# Altium PCB PCB1.PcbDoc
Units mil, origin at the board's own origin, x right, y up, seen from the top; angles counter-clockwise.
Board outline 6000 x 4000 mil, 2 copper layers (Top Layer, Bottom Layer); 6 components, 18 nets, 95 pads, 0 vias.
Unrouted connection lines stored in the file: 10.
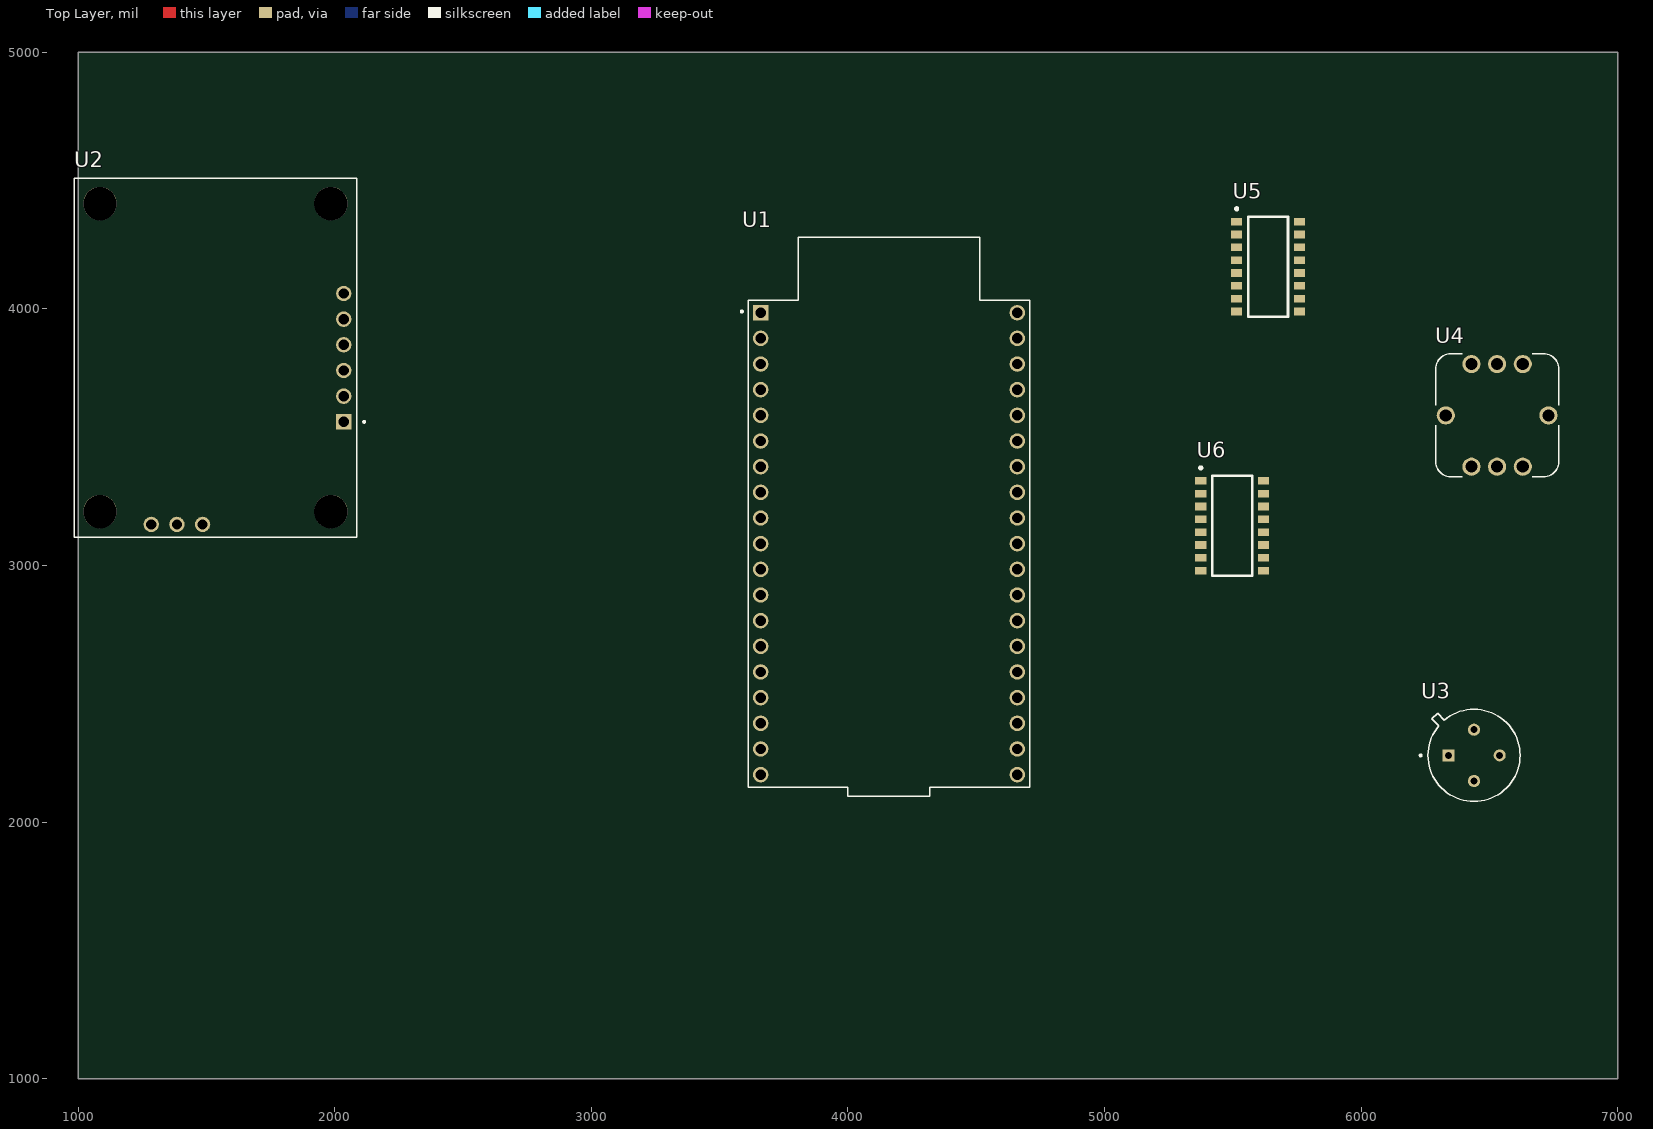
[diagram p0: Top Layer view]
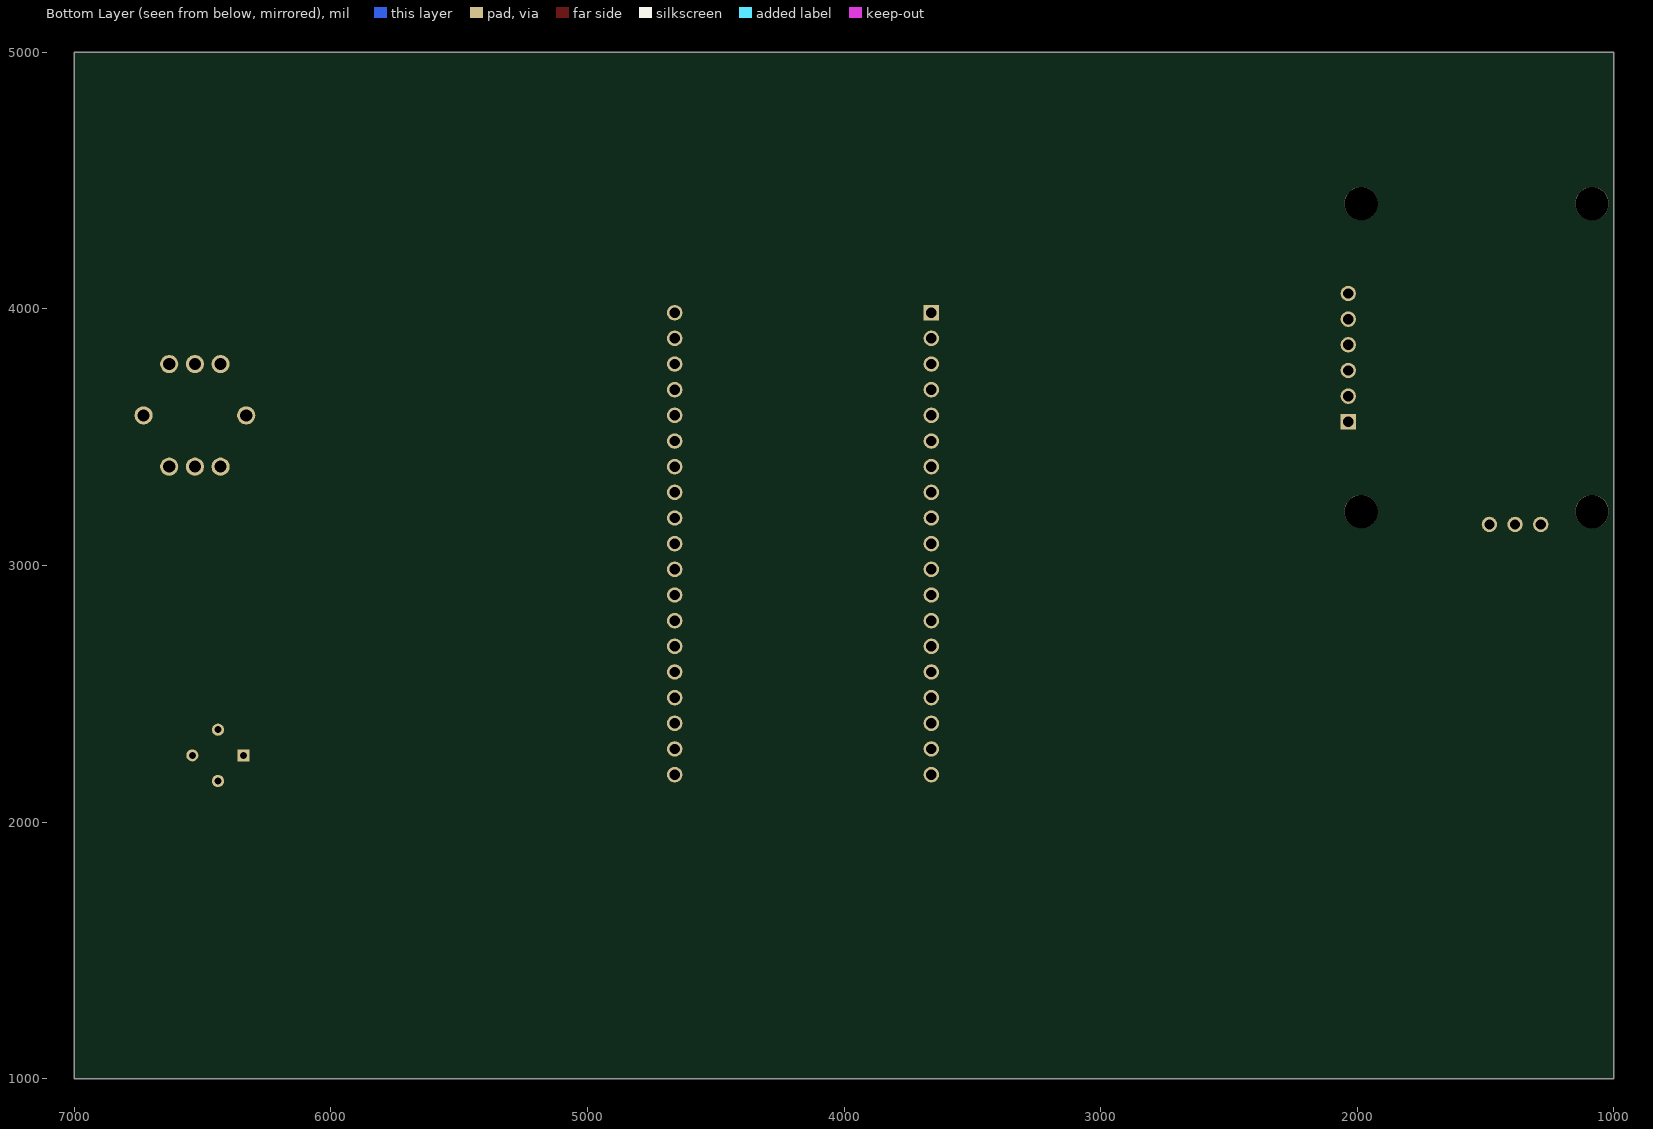
[diagram p1: Bottom Layer view, seen from below]

## Layer stack, top to bottom
Top Solder: solder mask 0.4, Solder Resist, Dk 3.5
Top Layer: signal copper 1.4
Dielectric 1: dielectric 12.6, FR-4, Dk 4.8
Bottom Layer: signal copper 1.4
Bottom Solder: solder mask 0.4, Solder Resist, Dk 3.5

## Board outline
1000,1000 7000,1000 7000,5000 1000,5000

## Design rules (kind name [scope] priority, off if disabled: settings)
Clearance [All] p1: gap=10 ignorepadtopadclearanceinfootprint=FALSE
PolygonConnect [All] p1: connectstyle=Relief reliefconductorwidth=10 reliefentries=4 polygonreliefangle="90 Angle" airgapwidth=10
RoutingVias [All] p1: holewidth=28 width=50 viastyle="Through Hole" minholewidth=28 minwidth=50 maxholewidth=28 maxwidth=50
SolderMaskExpansion [All] p1: expansion=4 istentingtop=FALSE
SupplyNets "Schematic Supply Nets_1" [InNet('GND')] p1: voltage=0.000
SupplyNets "Schematic Supply Nets" [InNet('VCC')] p2: voltage=0.000
Width [All] p1: maxlimit=10 minlimit=10 preferedwidth=10
30 further rules are at their usual default settings.

## Components (designator, comment, footprint, x,y, rotation, side; value= is the part's Value field where it differs from the comment)
U1 "ESP32-DEVKITC" MODULE_ESP32-DEVKITC 4160,3085.39 r0 top
U2 "SEN-12650" MODULE_SEN-12650 2085,3110 r90 top
U3 "MLX90614ESF-AAA-000-TU" TO254P912H435-4 6440,2260 r0 top
U4 "MAXREFDES117#" MODULE_MAXREFDES117# 6530,3585 r0 top
U5 "HX711" HX711 5635,4165 r0 top
U6 "HX711" HX711 5495,3155 r0 top

## Footprints (in the part's own frame and the unit in brackets; to place one, negate y for a bottom-side part, rotate by r counter-clockwise, add the part's x,y. Pads: shape width x height; smd on the part's side, far side on the other; paste and mask are expansions set on the pad)
HX711 [mm] "Load Cell amplifier"
  rect 1.1x0.76 smd: 1(-3.048,4.445) 2(-3.048,3.175) 3(-3.048,1.905) 4(-3.048,0.635) 5(-3.048,-0.635) 6(-3.048,-1.905) 7(-3.048,-3.175) 8(-3.048,-4.445) 9(3.175,-4.445) 10(3.175,-3.175) 11(3.175,-1.905) 12(3.175,-0.635) 13(3.175,0.635) 14(3.175,1.905) 15(3.175,3.175) 16(3.175,4.445)
  silkscreen extent -3.17,-4.95 2.03,5.84, body extent -3.02,-5.07 3.17,4.95, height 1.91
MODULE_ESP32-DEVKITC [mm]
  rect 1.53x1.53 / inner round 1.53 / far side rect 1.53x1.53 hole 1.02: 1(-12.7,22.85)
  round 1.53 hole 1.02: 2(-12.7,20.31) 3(-12.7,17.77) 4(-12.7,15.23) 5(-12.7,12.69) 6(-12.7,10.15) 7(-12.7,7.61) 8(-12.7,5.07) 9(-12.7,2.53) 10(-12.7,-0.01) 11(-12.7,-2.55) 12(-12.7,-5.09) 13(-12.7,-7.63) 14(-12.7,-10.17) 15(-12.7,-12.71) 16(-12.7,-15.25) 17(-12.7,-17.79) 18(-12.7,-20.33) 19(-12.7,-22.87) 20(12.7,-22.87) 21(12.7,-20.33) 22(12.7,-17.79) 23(12.7,-15.25) 24(12.7,-12.71) 25(12.7,-10.17) 26(12.7,-7.63) 27(12.7,-5.09) 28(12.7,-2.55) 29(12.7,-0.01) 30(12.7,2.53) 31(12.7,5.07) 32(12.7,7.61) 33(12.7,10.15) 34(12.7,12.69) 35(12.7,15.23) 36(12.7,17.77) 37(12.7,20.31) 38(12.7,22.85)
  silkscreen extent -14.67,-25 13.95,30.3, body extent -13.97,-24.8 13.97,30.3, height 6.69
MODULE_MAXREFDES117# [mm]
  round 1.8 hole 1.2: GND(-5.08,0) INT(-2.54,5.08) INT1(-2.54,-5.08) SCL(0,5.08) SCL1(0,-5.08) SDA(2.54,5.08) SDA1(2.54,-5.08) VIN(5.08,0)
  silkscreen extent -6.1,-6.1 6.1,6.1, body extent -6.1,-6.1 6.1,6.1, height 2.56
MODULE_SEN-12650 [mil]
  round 60 hole 40: JP1_1(50,600) JP1_2(50,700) JP1_3(50,800) JP3_2(550,50) JP3_3(650,50) JP3_4(750,50) JP3_5(850,50) JP3_6(950,50)
  rect 60x60 / inner round 60 / far side rect 60x60 hole 40: JP3_1(450,50)
  round 130 hole 130 unplated: ""(100,1000) ""(100,100) ""(1300,100) ""(1300,1000)
  silkscreen extent 0,-33 1400,1100
TO254P912H435-4 [mm]
  rect 1.198x1.198 / inner round 1.198 / far side rect 1.198x1.198 hole 0.69: 1(-2.54,0)
  round 1.198 hole 0.69: 2(0,-2.54) 3(2.54,0) 4(0,2.54)
  silkscreen extent -5.38,-4.56 4.56,4.56, body extent -4.56,-4.56 4.56,4.56, height 4.25

## Part data
U1: "ESP32-WROOM-32UE series Transceiver; 802.11 b/g/n (Wi-Fi, WiFi, WLAN), Bluetooth Â® Smart Ready 4.x Dual Mode Evaluation Board", Package=None, Check_prices=https://www.snapeda.com/parts/ESP32-DEVKITC/Espressif+Systems/view-part/?ref=eda, MF="Espressif Systems", MP=ESP32-DEVKITC, SnapEDA_Link=https://www.snapeda.com/parts/ESP32-DEVKITC/Espressif+Systems/view-part/?ref=snap
U2: "AD8232 Analog Front End (AFE) for ECG, EKG Interface Evaluation Board", Package=None, Availability="In Stock", Check_prices=https://www.snapeda.com/parts/SEN-12650/SparkFun+Electronics/view-part/?ref=eda, MF="SparkFun Electronics", MP=SEN-12650, Price=None, Purchase-URL=https://pricing.snapeda.com/search/part/SEN-12650/?ref=eda, SnapEDA_Link=https://www.snapeda.com/parts/SEN-12650/SparkFun+Electronics/view-part/?ref=snap
U3: Package=None, Availability=Unavailable, MP=MLX90614ESF-AAA-000-TU, Price=None
U4: "MAX1921, MAX14595, MAX30102 series Medical, Pulse Oximeter (PO or SpO2) Sensor Evaluation Board", Package=None, Check_prices=https://www.snapeda.com/parts/MAXREFDES117%23/Analog+Devices/view-part/?ref=eda, MF="Analog Devices", MP=MAXREFDES117#, SnapEDA_Link=https://www.snapeda.com/parts/MAXREFDES117%23/Analog+Devices/view-part/?ref=snap
U5 U6: "Load cell amplifier", ComponentLink1Description=DATASHEET, ComponentLink1URL=https://www.alldatasheet.com/datasheet-pdf/download/1132222/AVIA/HX711.html

## Nets (pads, with @x,y where several pads share a name; then routed paths per layer and width w, separated by ;. In a path a pad name is that pad's centre, name@x,y a point inside that pad or via, vN(x,y) a via of type N, cw(c..) or ccw(c..) an arc to the next point about the centre after c; other vN are vias at no path point)
GND: U1.38 U2.JP3_1 U3.4 U6.13
Net_1: 
Net_2: 
NetC2_2: U6.10 U6.14
NetC3_1: 
NetC4_1: 
NetC4_2: 
NetQ1_2: U6.11
NetR1_1: 
NetR5_1: 
NetR6_1: 
NetU1_1: U1.1 U2.JP3_2
NetU1_5: U1.5 U2.JP3_3
NetU1_7: U1.7 U2.JP3_5
NetU1_8: U1.8 U2.JP3_4
NetU1_21: U1.21 U3.1
NetU1_22: U1.22 U3.2
VCC: U3.3
pads on no net: U1.2 U1.3 U1.4 U1.6 U1.9 U1.10 U1.11 U1.12 U1.13 U1.14 U1.15 U1.16 U1.17 U1.18 U1.19 U1.20 U1.23 U1.24 U1.25 U1.26 U1.27 U1.28 U1.29 U1.30 U1.31 U1.32 U1.33 U1.34 U1.35 U1.36 U1.37 U2. U2.JP1_1 U2.JP1_2 U2.JP1_3 U2.JP3_6 U4.GND U4.INT U4.INT1 U4.SCL U4.SCL1 U4.SDA U4.SDA1 U4.VIN U5.1 U5.2 U5.3 U5.4 U5.5 U5.6 U5.7 U5.8 U5.9 U5.10 U5.11 U5.12 U5.13 U5.14 U5.15 U5.16 U6.1 U6.2 U6.3 U6.4 U6.5 U6.6 U6.7 U6.8 U6.9 U6.12 U6.15 U6.16